# Altium PCB CONTROL.PcbDoc
Units mm, origin at the board's own origin, x right, y up, seen from the top; angles counter-clockwise.
Board outline 47.05 x 104.99 mm, 2 copper layers (Top Layer, Bottom Layer); 42 components, 19 nets, 156 pads, 0 vias.
Unrouted connection lines stored in the file: 2.
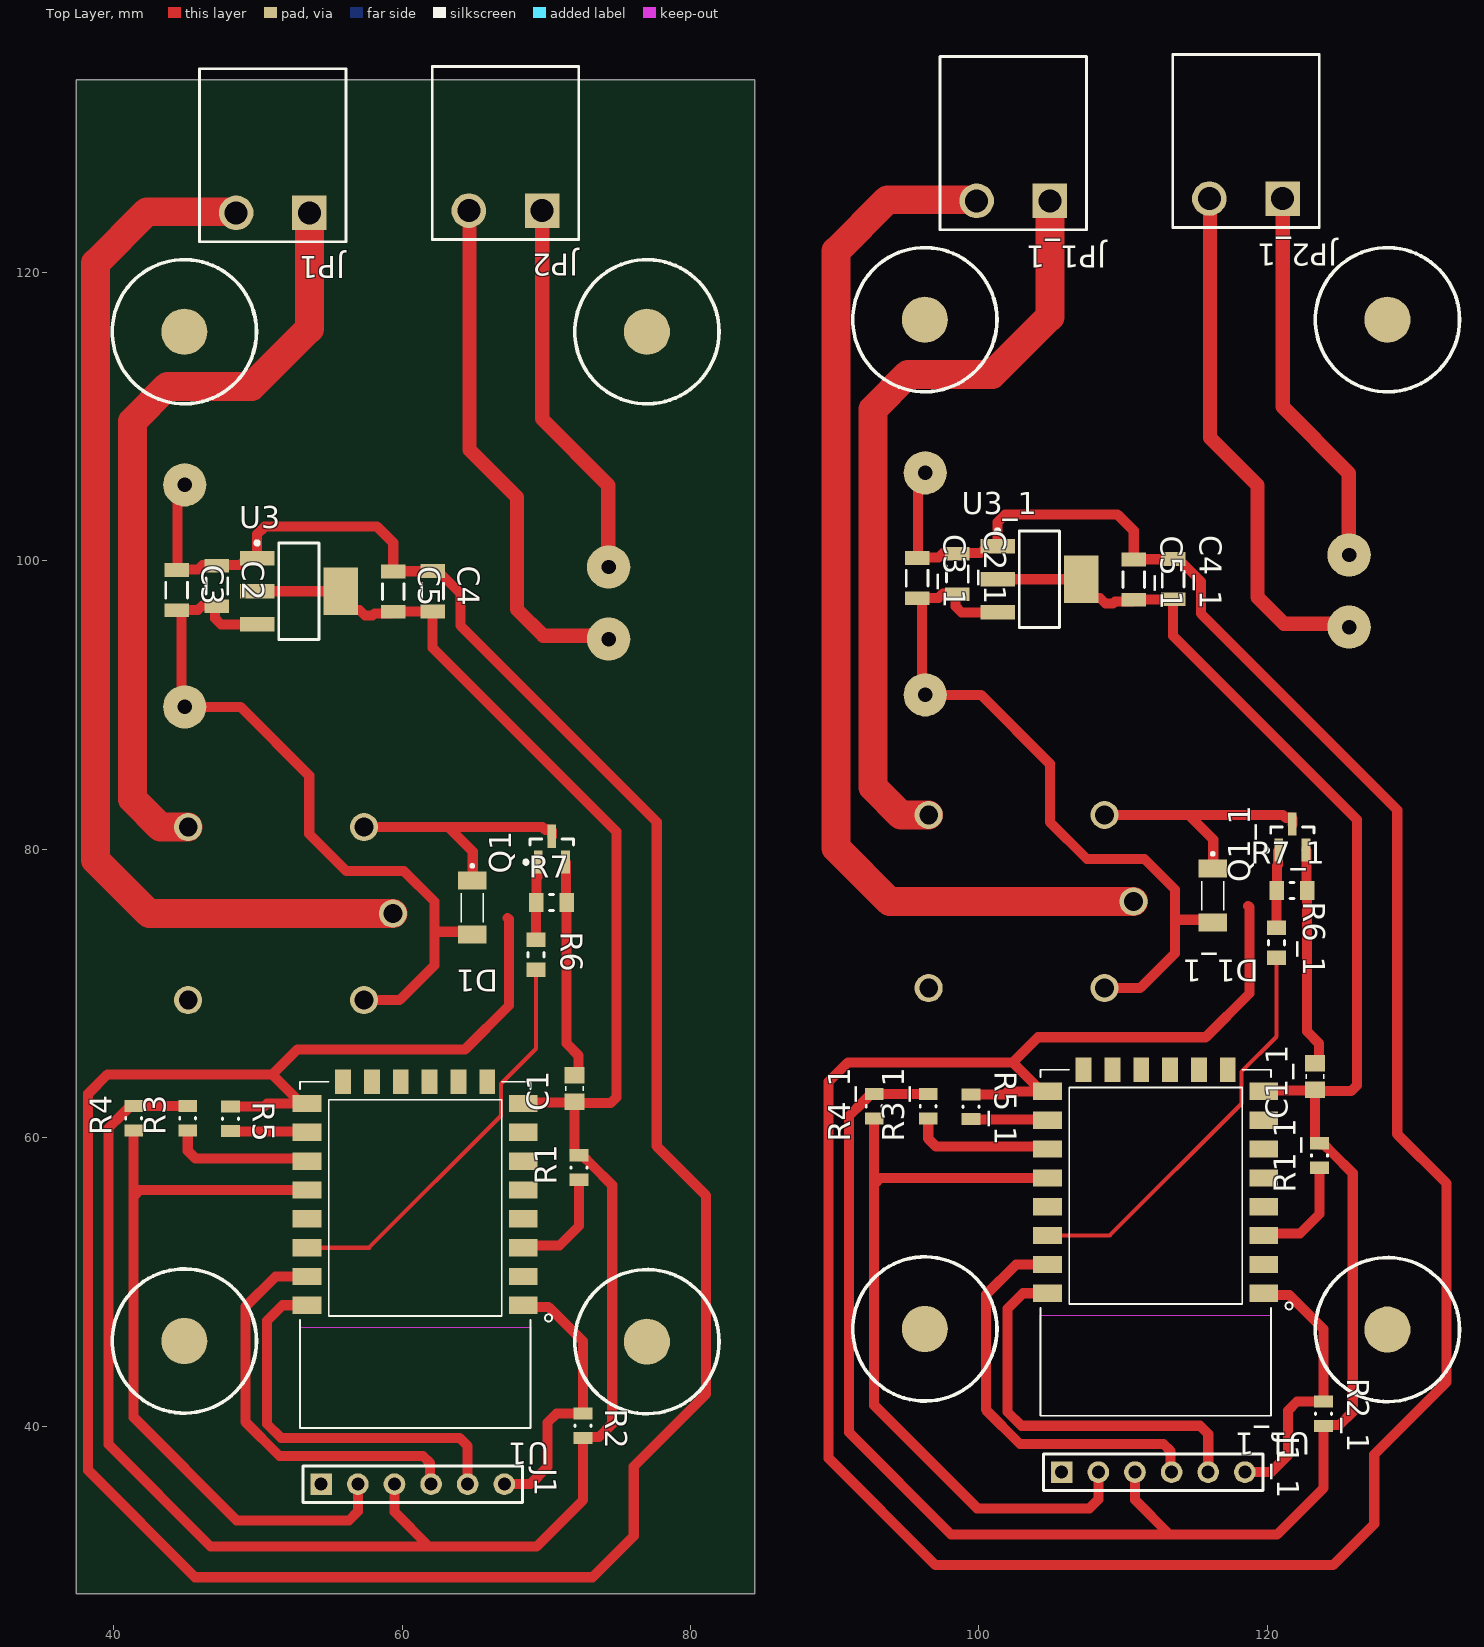
[diagram p0: Top Layer view]
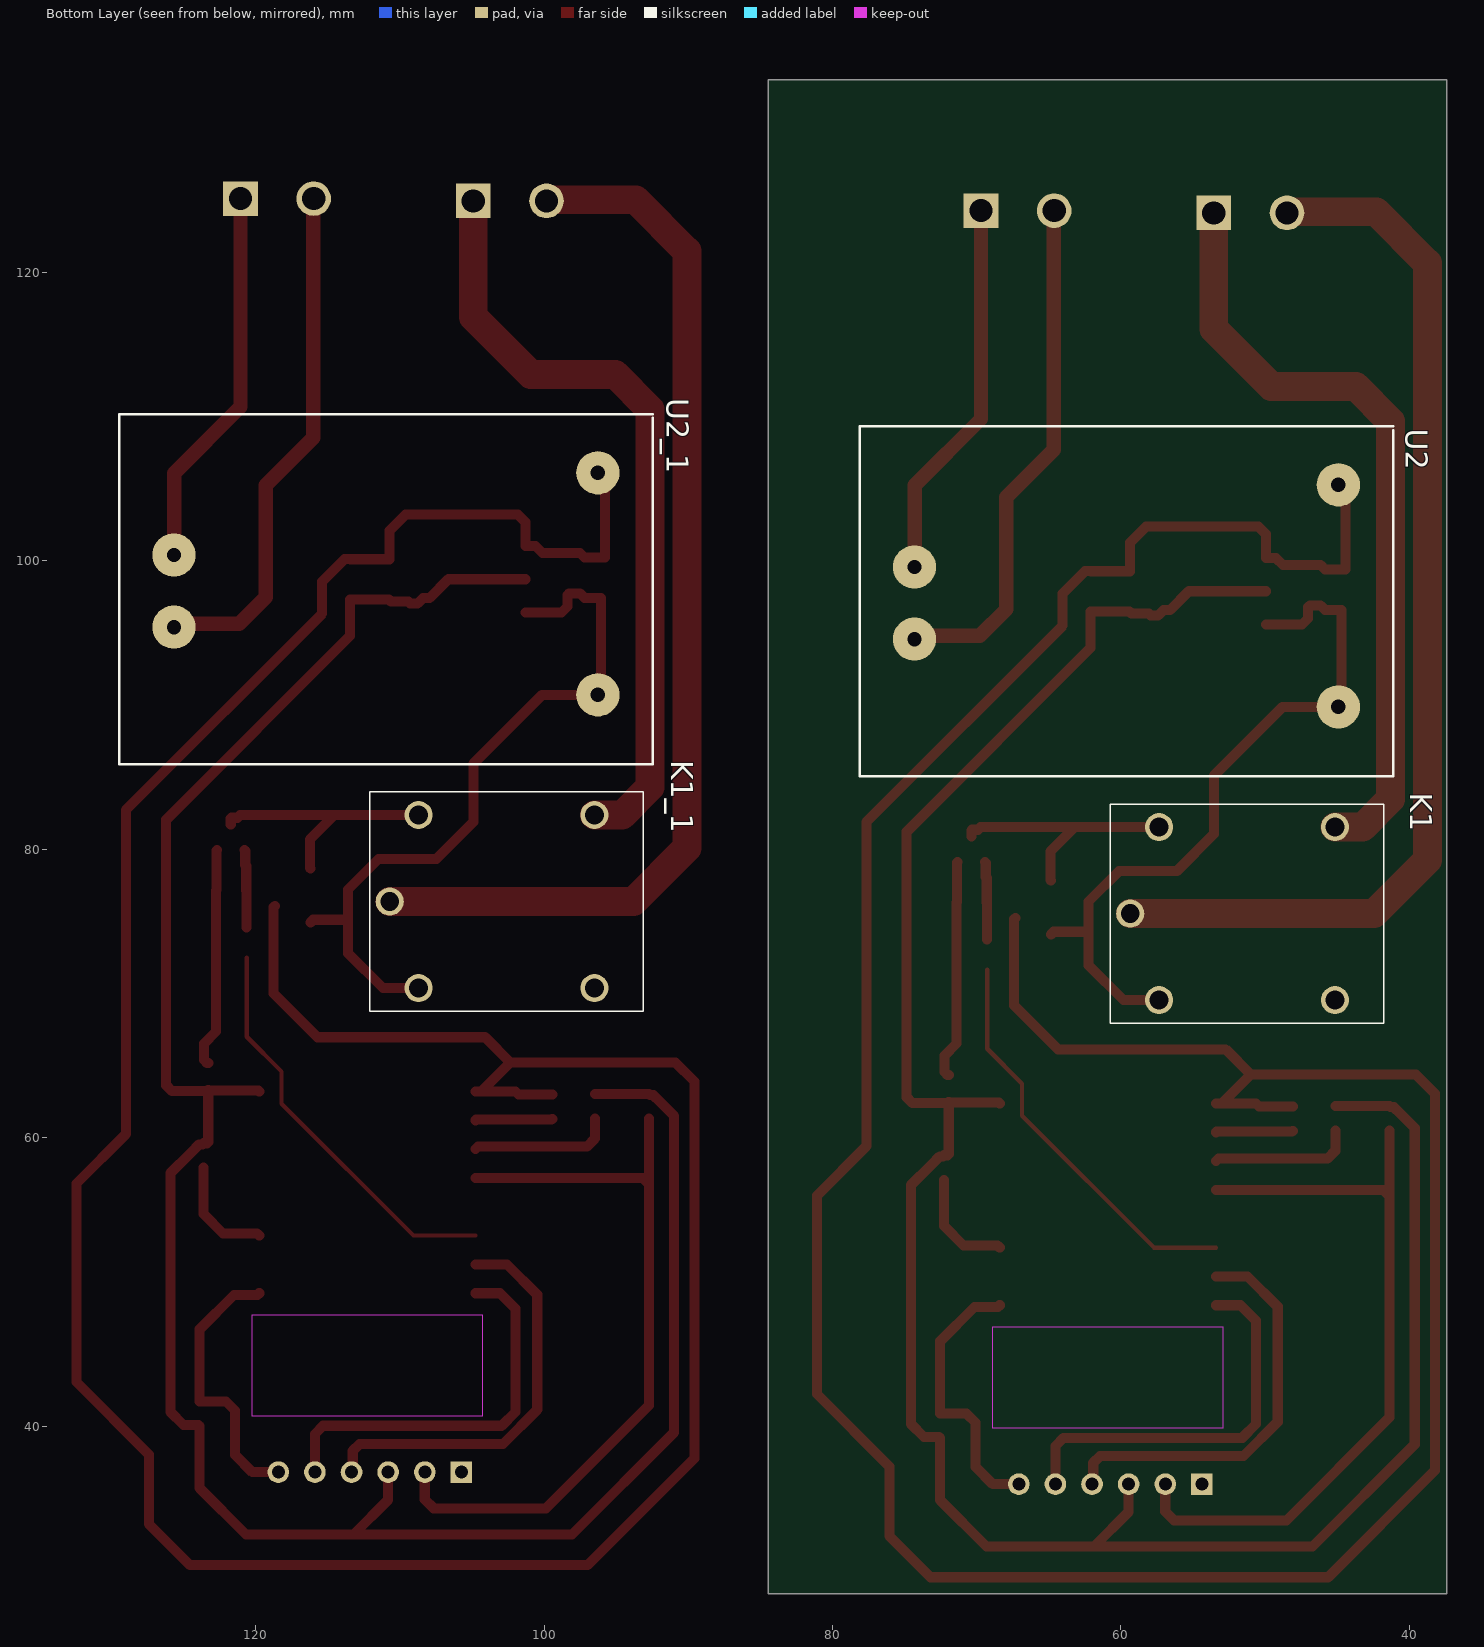
[diagram p1: Bottom Layer view, seen from below]

## Layer stack, top to bottom
Top Solder: solder mask 0.0102, Solder Resist, Dk 3.5
Top Layer: signal copper 0.0356
Dielectric 1: dielectric 0.32, FR-4, Dk 4.8
Bottom Layer: signal copper 0.0356
Bottom Solder: solder mask 0.0102, Solder Resist, Dk 3.5

## Board outline
37.401,28.378 37.401,133.368 84.455,133.368 84.455,28.378

## Design rules (kind name [scope] priority, off if disabled: settings)
Clearance [All] p1: gap=0.254 ignorepadtopadclearanceinfootprint=FALSE except(0: Arc-Hole Track-Hole SMDPad-Hole THPad-Hole Via-Hole Fill-Hole Poly-Hole Region-Hole Text-Hole)
PolygonConnect [All] p1: connectstyle=Relief reliefconductorwidth=0.254 reliefentries=4 polygonreliefangle="90 Angle" airgapwidth=0.254
RoutingVias [All] p1: holewidth=0.711 width=1.27 viastyle="Through Hole" minholewidth=0.711 minwidth=1.27 maxholewidth=0.711 maxwidth=1.27
SolderMaskExpansion [All] p1: expansion=0.102 istentingtop=FALSE
Width [All] p1: maxlimit=3 minlimit=0.254 preferedwidth=0.254
30 further rules are at their usual default settings.

## Classes and differential pairs
component class "Water Control": C1 C2 C3 C4 C5 D1 J1 JP1 JP2 K1 Q1 R1 R2 R3 R4 R5 R6 R7 U1 U2 U3

## Components (designator, comment, footprint, x,y, rotation, side; value= is the part's Value field where it differs from the comment)
C1 "08055C104KAJ2A" CAPC0805 71.939,63.409 r90 top
C1_1 "08055C104KAJ2A" CAPC0805 123.298,64.244 r90 top (schematic designator C1)
C2 "CAP 2.7uF 10V 1206(3216)" CAPC1206(3216)110_L 47.146,98.261 r270 top value=2.7uF
C2_1 "CAP 2.7uF 10V 1206(3216)" CAPC1206(3216)110_L 98.506,99.096 r270 top value=2.7uF (schematic designator C2)
C3 "CAP 2.7uF 10V 1206(3216)" CAPC1206(3216)110_L 44.348,97.969 r270 top value=2.7uF
C3_1 "CAP 2.7uF 10V 1206(3216)" CAPC1206(3216)110_L 95.707,98.804 r270 top value=2.7uF (schematic designator C3)
C4 "CAP 2.7uF 10V 1206(3216)" CAPC1206(3216)110_L 62.101,97.898 r270 top value=2.7uF
C4_1 "CAP 2.7uF 10V 1206(3216)" CAPC1206(3216)110_L 113.46,98.733 r270 top value=2.7uF (schematic designator C4)
C5 "CAP 2.7uF 10V 1206(3216)" CAPC1206(3216)110_L 59.373,97.866 r270 top value=2.7uF
C5_1 "CAP 2.7uF 10V 1206(3216)" CAPC1206(3216)110_L 110.732,98.701 r270 top value=2.7uF (schematic designator C5)
D1 "5.8V zener diode" BZT55B13GS08 64.857,75.951 r270 top
D1_1 "5.8V zener diode" BZT55B13GS08 116.216,76.786 r270 top (schematic designator D1)
J1 "22-23-2061" HDR1X6 54.38,35.967 r0 top
J1_1 "22-23-2061" HDR1X6 105.739,36.802 r0 top (schematic designator J1)
JP1 "LOAD" 691312510002 51.019,128.138 r180 top
JP1_1 "LOAD" 691312510002 102.378,128.973 r180 top (schematic designator JP1)
JP2 "LOAD" 691312510002 67.162,128.296 r180 top
JP2_1 "LOAD" 691312510002 118.521,129.131 r180 top (schematic designator JP2)
K1 "0476618" 0476618 51.251,75.541 r180 bottom
K1_1 "0476618" 0476618 102.611,76.376 r180 bottom (schematic designator K1)
Q1 "BC847" SOT23-3 70.373,80.005 r90 top
Q1_1 "BC847" SOT23-3 121.733,80.84 r90 top (schematic designator Q1)
R1 "2R55 1% 0805(2012)" RESC0805(2012)_L 72.258,57.927 r90 top value="2.55 Ohm"
R1_1 "2R55 1% 0805(2012)" RESC0805(2012)_L 123.617,58.762 r90 top value="2.55 Ohm" (schematic designator R1)
R2 "2R55 1% 0805(2012)" RESC0805(2012)_L 72.531,40.011 r270 top value="2.55 Ohm"
R2_1 "2R55 1% 0805(2012)" RESC0805(2012)_L 123.89,40.846 r270 top value="2.55 Ohm" (schematic designator R2)
R3 "2R55 1% 0805(2012)" RESC0805(2012)_L 45.121,61.338 r90 top value="2.55 Ohm"
R3_1 "2R55 1% 0805(2012)" RESC0805(2012)_L 96.48,62.173 r90 top value="2.55 Ohm" (schematic designator R3)
R4 "2R55 1% 0805(2012)" RESC0805(2012)_L 41.372,61.338 r90 top value="2.55 Ohm"
R4_1 "2R55 1% 0805(2012)" RESC0805(2012)_L 92.731,62.173 r90 top value="2.55 Ohm" (schematic designator R4)
R5 "2R55 1% 0805(2012)" RESC0805(2012)_L 48.081,61.31 r270 top value="2.55 Ohm"
R5_1 "2R55 1% 0805(2012)" RESC0805(2012)_L 99.44,62.145 r270 top value="2.55 Ohm" (schematic designator R5)
R6 "4.7K" RESC0805 69.273,72.685 r270 top
R6_1 "4.7K" RESC0805 120.633,73.52 r270 top (schematic designator R6)
R7 "100K" RESC0805 70.35,76.311 r0 top
R7_1 "100K" RESC0805 121.709,77.146 r0 top (schematic designator R7)
U1 "ESP8266-12E/ESP-12E" *XCVR_ESP8266-12E/ESP-12E 60.897,55.374 r180 top
U1_1 "ESP8266-12E/ESP-12E" *XCVR_ESP8266-12E/ESP-12E 112.256,56.209 r180 top (schematic designator U1)
U2 "230v to5v" 230V-5V 59.191,98.158 r180 bottom
U2_1 "230v to5v" 230V-5V 110.551,98.993 r180 bottom (schematic designator U2)
U3 "LM1117MPX-3.3" MP04A_N 52.833,97.894 r0 top
U3_1 "LM1117MPX-3.3" MP04A_N 104.192,98.729 r0 top (schematic designator U3)

## Footprints (in the part's own frame and the unit in brackets; to place one, negate y for a bottom-side part, rotate by r counter-clockwise, add the part's x,y. Pads: shape width x height; smd on the part's side, far side on the other; paste and mask are expansions set on the pad)
230V-5V [mm]
  round 3 hole 1: 1(-15.123,1.419) 2(-15.123,-3.581) 3(14.277,7.119) 4(14.277,-8.281)
  silkscreen extent -18.92,-13.08 18.08,11.18
0476618 [mm]
  round 1.95 hole 1.3: 1(-6.1,-6) 2(6.1,-6) 3(6.1,6) 4(-6.1,6) 5(-8.1,0)
  silkscreen extent -9.5,-7.6 9.5,7.6, body extent -9.5,-7.6 9.5,7.6, height 15
691312510002 [mm]
  rect 2.4x2.4 hole 1.6: 1(-2.54,4)
  round 2.4 hole 1.6: 2(2.54,4)
  silkscreen extent -5.08,-6 5.08,6, body extent -5.08,-6 5.08,6, height 8.55
*XCVR_ESP8266-12E/ESP-12E [mm]
  rect 2x1.2 smd: 1(-7.5,7) 2(-7.5,5) 3(-7.5,3) 4(-7.5,1) 5(-7.5,-1) 6(-7.5,-3) 7(-7.5,-5) 8(-7.5,-7) 15(7.5,-7) 16(7.5,-5) 17(7.5,-3) 18(7.5,-1) 19(7.5,1) 20(7.5,3) 21(7.5,5) 22(7.5,7)
  rect 1.1x1.7 smd: 9(-5,-8.5) 10(-3,-8.5) 11(-1,-8.5) 12(1,-8.5) 13(3,-8.5) 14(5,-8.5)
  Keep-Out Layer region: -8.009,15.5 8,15.5 8,8.51 -8.009,8.51
  Keep-Out Layer region: -8.009,15.5 8,15.5 8,8.51 -8.009,8.51
  Keep-Out Layer region: -8.009,15.5 8,15.5 8,8.51 -8.009,8.51
  Keep-Out Layer region: -8.009,15.5 8,15.5 8,8.51 -8.009,8.51
  Keep-Out Layer region: -8.009,15.5 8,15.5 8,8.51 -8.009,8.51
  Keep-Out Layer region: -8.009,15.5 8,15.5 8,8.51 -8.009,8.51
  silkscreen extent -9.5,-8.5 8,15.5
BZT55B13GS08 [mm]
  rect 1.25x2 smd: 1(-1.875,0) 2(1.875,0)
  silkscreen extent -3,-0.75 1,0.75
CAPC0805 [mm]
  rect 1.15x1.4 smd: 1(-0.925,0) 2(0.925,0)
  silkscreen extent -0.15,-0.6 0.15,0.6, body extent -1.1,-0.67 1.1,0.67, height 0.8
CAPC1206(3216)110_L [mm] "Chip Capacitor, Body 3.2x1.6mm, Height 1.1mm, IPC High Density"
  rect 0.95x1.7 smd: 1(-1.4,0) 2(1.4,0)
  silkscreen extent -0.55,-0.75 0.55,0.75, body extent -1.7,-0.9 1.7,0.9, height 1.1
HDR1X6 [mm] "Connector; Header; 6 Position"
  rect 1.5x1.5 hole 0.9: 1(0,0)
  round 1.5 hole 0.9: 2(2.54,0) 3(5.08,0) 4(7.62,0) 5(10.16,0) 6(12.7,0)
  silkscreen extent -1.27,-1.27 13.97,1.27
MP04A_N [mm] "SOT223, 4-Leads, Body 6.5x3.5mm, Pitch 2.3mm, Lead Span 7mm, IPC Medium Density"
  rect 2.4x1 smd: 1(-2.9,2.3) 2(-2.9,0) 3(-2.9,-2.3)
  rect 2.4x3.3 smd: 4(2.9,0)
  silkscreen extent -3.02,-3.35 1.4,3.47, body extent -1.86,-3.35 1.86,3.35, height 1.8
RESC0805 [mm]
  rect 1x1.3 smd: 1(-1.05,0) 2(1.05,0)
  silkscreen extent -0.15,-0.55 0.15,0.55, body extent -1.1,-0.62 1.1,0.63, height 0.6
RESC0805(2012)_L [mm] "Chip Resistor, Body 2.0x1.3mm, IPC High Density"
  rect 0.85x1.3 smd: 1(-0.85,0) 2(0.85,0)
  silkscreen extent -0.05,-0.55 0.05,0.55, body extent -1.1,-0.67 1.1,0.68, height 0.7
SOT23-3 [mm]
  rect 1.6x0.6 smd: 1(-0.9,0.95) 2(-0.9,-0.95) 3(0.9,0)
  silkscreen extent -1.02,-1.5 0.7,1.92, body extent -0.7,-1.5 0.7,1.5, height 1.1

## Part data
C1 C1_1: library part CMP-2007-04765-1, Manufacturer="AVX Interconnect / Elco", Part Number=08055C104KAJ2A
C2 C2_1 C3 C3_1 C4 C4_1 C5 C5_1: library part CMP-1037-04841-1, "CAP 2.7uF 10V ±10% 1206 (3216 Metric) Thickness 1.05mm SMD", Case-EIA=1206, Case-Metric=3216, Rated Voltage="10 V", Tolerance=Â±10%, Max Thickness="1.05 mm", Technology=SMT
D1 D1_1: library part DIODE
J1 J1_1: library part CMP-2000-05536-1, "Male Header, Pitch 2.54 mm, 1 x 6 Position, Height 10.67 mm, Tail Length 3.56 mm, 0 to 70 degC, RoHS, Bulk", Current Rating=4A, Manufacturer=Molex, Package Description="Male Header, Pitch 2.54 mm, 1 x 6 Position, Height 10.67 mm, Tail Length 3.56 mm", Voltage Rating=250V, =002223206122-23-2061-PBA-6373-06A102, Brand=Molex, Contact Material=Brass, Contact Plating=Tin, Datasheet URL=https://datasheet.ciiva.com/19460/232303-19460895.pdf, Datasheet Version="Rev. P, 09/2001", Factory Pack Quantity=1000, Housing Material=Nylon, Manufacturer URL=http://www.molex.com/, Mounting Angle=Vertical, Mounting Style=ThroughHole, Mounting Technology=ThroughHole, Number of Positions=6, Number of Positions / Contacts=6, Number of Rows=1, Package Reference=22-23-2061, Packaging=Bulk, Pitch=2.54mm, Product Category=.100K.K.Connectors, Product Type=Headers, RoHS=Details, Series=6373, Termination Style=ThroughHole, Tradename=KK, Type=PinStrip
JP1 JP1_1 JP2 JP2_1: library part "HEADER 2"
K1 K1_1: "Relay or Contactor", Manufacturer_Name="RS Components", Datasheet Link=https://docs-emea.rs-online.com/webdocs/1583/0900766b81583163.pdf, Height=15mm, Manufacturer_Part_Number=0476618
Q1 Q1_1: library part "NPN BEC"
R1 R1_1 R2 R2_1 R3 R3_1 R4 R4_1 R5 R5_1: library part CMP-1013-00215-1, "2R55 0.125W 1% 0805 (2012 Metric)  SMD", Case-EIA=0805, Case-Metric=2012, Power="0.125 W", Tolerance="1 %", Technology=SMT
R6 R6_1 R7 R7_1: library part RES1, "RESISTOR"
U1 U1_1: "This WiFi module has a 32-bit MCU micro and clock speeds supporting 80 MHz or 160 MHz. Supports the RTOS and integrated Wi-Fi MAC/BB/RF/PA/LNA, and has an on-board antenna.", Package=None, Availability=Unavailable, MF=AI-Thinker, MP=ESP8266-12E/ESP-12E, Price=None, SnapEDA_Link=https://www.snapeda.com/parts/ESP8266-12E/ESP-12E/AI-Thinker/view-part/?ref=snap
U3 U3_1: library part CMP-0062-01659-3, "800mA Low-Dropout Linear Regulator, 4-pin SOT-223", Manufacturer="National Semiconductor", PackageTopMarking=XYTT*N05A, PowerWise=N, Code_IPC=SOT223-4, Code_JEDEC=TO-261-AA, ComponentLink1Description="Manufacturer URL", ComponentLink1URL=http://www.national.com/, ComponentLink2Description="LM1117 Datasheet", ComponentLink2URL=http://www.national.com/ds/LM/LM1117.pdf, ComponentLink3Description="LM1117 Web Page", ComponentLink3URL=http://www.national.com/pf/LM/LM1117.html, ComponentLink4Description="MP04A Package Page", ComponentLink4URL=http://www.national.com/packaging/folders/mp04a.html, CompType="LDO IC", DatasheetVersion=Apr-2006, High-Reliability=Y, PackageDescription="Molded SOT-223, 6.50 x 3.56 x 1.6mm Body, 4 Lead, 2.3mm Pitch", PackageReference=MP04A, PackageVersion="revB, Apr-2003", PartNumber=LM1117MPX-3.3, PinCount=4, RevisionNote="SCH symbol layout adjusted", RoHS=N

## Free pads (board coordinates)
  round 3.2 smd: ""(44.887,45.896) ""(44.887,115.896) ""(76.969,45.852) ""(76.969,115.895) ""(96.246,46.731) ""(96.246,116.731) ""(128.328,46.687) ""(128.329,116.73)

## Nets (pads, with @x,y where several pads share a name; then routed paths per layer and width w, separated by ;. In a path a pad name is that pad's centre, name@x,y a point inside that pad or via, vN(x,y) a via of type N, cw(c..) or ccw(c..) an arc to the next point about the centre after c; other vN are vias at no path point)
+3.3V: C1.1 C4.2 C5.2 J1.3 R1.2 R2.2 R3.2 R4.2 U1.8 U3.2 U3.4 | length 159.7
  Top Layer w0.7: R3.2 R4.2 41.297,62.113 41.072,62.113 40.577,61.618 40.573,61.618 39.62,60.665 39.62,38.734 46.707,31.646 61.86,31.646 ; U3.2 55.283,97.894 56.583,96.594 57.033,96.594 57.41,96.217 57.944,96.217 58.069,96.341 59.248,96.341 C5.2 59.389,96.482 62.085,96.482 C4.2 62.101,93.977 74.858,81.22 74.858,62.801 74.448,62.391 72.032,62.391 C1.1 ; J1.3 59.46,34.047 61.86,31.646 ; U1.8 68.452,62.429 71.884,62.429 C1.1 ; 61.86,31.646 69.32,31.646 72.531,34.857 R2.2 72.606,39.236 73.651,39.236 74.565,40.15 74.565,56.699 73.158,58.106 73.154,58.106 72.558,58.702 72.333,58.702 R1.2 72.033,58.777 71.939,58.871 C1.1
+5V: C2.2 C3.2 D1.2 K1.1 U2.4 U3.3 | length 51.5
  Top Layer w0.7: U3.3 47.431,95.594 47.021,96.004 47.021,96.789 46.896,96.914 46.146,96.914 45.838,96.606 44.702,96.606 44.702,90.09 U2.4 48.779,89.877 53.553,85.103 53.553,81.059 56.126,78.486 60.125,78.486 62.239,76.372 62.239,74.281 ; K1.1 59.823,69.541 62.239,71.957 62.239,74.281 ; D1.2 64.652,74.281 62.239,74.281
COM_2: JP1.2 K1.5 | length 74.8
  Top Layer w2: JP1.2 48.402,124.215 42.292,124.215 38.735,120.658 38.735,79.256 42.45,75.541 K1.5
DTR: J1.2 R4.1 U1.18 | length 52.8
  Top Layer w0.7: R4.1 41.372,55.939 ; U1.18 41.807,56.374 41.372,55.939 ; J1.2 56.92,34.067 56.305,33.453 48.519,33.453 41.372,40.6 41.372,55.939
GND: C1.2 C2.1 C3.1 C4.1 C5.1 J1.1 Q1.2 R5.1 R7.2 U1.15 U2.3 U3.1 | length 235.1
  Top Layer w0.7: U2.3 44.914,104.655 44.426,104.166 44.426,99.406 45.838,99.406 46.146,99.714 48.753,99.714 49.233,100.194 U3.1 49.933,101.853 50.455,102.375 58.258,102.375 59.373,101.26 C5.1 59.389,99.282 62.085,99.282 C4.1 62.476,99.298 64.034,97.74 64.034,95.509 77.651,81.892 77.651,59.409 81.081,55.98 81.081,42.218 76.056,37.193 76.056,32.37 73.201,29.514 45.626,29.514 38.215,36.926 38.215,63.054 39.544,64.383 50.987,64.383 ; R5.1 50.42,62.16 50.633,62.374 U1.15@52.997,62.374 ; U1.15 U1.15@52.997,62.374 ; 67.311,75.241 67.401,75.151 67.401,69.165 64.363,66.128 52.732,66.128 50.987,64.383 ; Q1.2 71.362,79.067 71.362,76.349 R7.2 71.4,66.523 72.235,65.688 72.235,64.559 72.01,64.334 C1.2 ; 50.987,64.383 U1.15@52.997,62.374
NC_2: K1.2
NetD1_1: D1.1 K1.4 Q1.3 | length 17.9
  Top Layer w0.7: K1.4 63.193,81.541 ; D1.1 64.888,77.857 64.888,79.846 63.193,81.541 ; Q1.3 70.374,81.305 70.324,81.355 69.924,81.355 69.738,81.541 63.193,81.541
NetQ1_1: Q1.1 R6.1 R7.1 | length 5.4
  Top Layer w0.7: R6.1 69.287,73.748 69.287,76.298 R7.1 69.3,78.011 69.373,78.084 69.373,79.055 Q1.1
NetR1_1: R1.1 U1.3 | length 7.7
  Top Layer w0.7: U1.3 68.548,52.524 70.913,52.524 72.258,53.869 R1.1
NetR3_1: R3.1 U1.17 | length 10
  Top Layer w0.7: R3.1 45.121,59.094 45.671,58.544 53.227,58.544 U1.17
NEUTRAL: JP2.2 U2.2 | length 36.2
  Top Layer w1: JP2.2@64.666,124.296 64.666,107.712 67.96,104.418 67.96,96.637 69.794,94.802 74.089,94.802 U2.2
NO_2: JP1.1 K1.3 | length 53.8
  Top Layer w2: K1.3 43.232,81.541 41.301,83.472 41.301,109.688 43.714,112.101 49.567,112.101 53.559,116.092 JP1.1
PHASE: JP2.1 U2.1 | length 26.6
  Top Layer w1: JP2.1@69.199,124.032 69.7,123.531 69.7,109.848 74.296,105.252 74.296,99.595 U2.1
RELAY2: R6.2 U1.20 | length 28.4
  Top Layer w0.3: U1.20 57.702,52.374 66.851,61.523 66.851,63.744 69.273,66.167 R6.2
RST: J1.6 R2.1 U1.1 | length 19.5
  Top Layer w0.7: J1.6 68.88,35.967 70.082,37.169 70.082,40.238 70.704,40.861 R2.1 72.531,45.88 70.158,48.253 68.517,48.253 U1.1
RX: J1.4 U1.21 | length 28.6
  Top Layer w0.7: U1.21 51.221,50.374 49.119,48.272 49.119,40.297 51.492,37.924 61.435,37.924 61.914,37.445 61.914,36.052 J1.4
RX1: U1.7
TX: J1.5 U1.22 | length 27.6
  Top Layer w0.7: U1.22 51.698,48.374 50.624,47.3 50.624,40.141 51.584,39.181 63.972,39.181 64.54,38.614 J1.5
TX1: R5.2 U1.16 | length 5.4
  Top Layer w0.7: R5.2 48.124,60.417 53.354,60.417 U1.16
pads on no net: C1_1.1 C1_1.2 C2_1.1 C2_1.2 C3_1.1 C3_1.2 C4_1.1 C4_1.2 C5_1.1 C5_1.2 D1_1.1 D1_1.2 J1_1.1 J1_1.2 J1_1.3 J1_1.4 J1_1.5 J1_1.6 JP1_1.1 JP1_1.2 JP2_1.1 JP2_1.2 K1_1.1 K1_1.2 K1_1.3 K1_1.4 K1_1.5 Q1_1.1 Q1_1.2 Q1_1.3 R1_1.1 R1_1.2 R2_1.1 R2_1.2 R3_1.1 R3_1.2 R4_1.1 R4_1.2 R5_1.1 R5_1.2 R6_1.1 R6_1.2 R7_1.1 R7_1.2 U1.2 U1.4 U1.5 U1.6 U1.9 U1.10 U1.11 U1.12 U1.13 U1.14 U1.19 U1_1.1 U1_1.2 U1_1.3 U1_1.4 U1_1.5 U1_1.6 U1_1.7 U1_1.8 U1_1.9 U1_1.10 U1_1.11 U1_1.12 U1_1.13 U1_1.14 U1_1.15 U1_1.16 U1_1.17 U1_1.18 U1_1.19 U1_1.20 U1_1.21 U1_1.22 U2_1.1 U2_1.2 U2_1.3 U2_1.4 U3_1.1 U3_1.2 U3_1.3 U3_1.4
copper on no net: | length 840.8
  Top Layer w0.3: 104.756,53.209 109.061,53.209 118.21,62.358 118.21,64.579 120.633,67.002 120.633,72.47
  Top Layer w0.7: 92.731,61.323 92.731,56.774 ; 96.274,106.112 96.274,105.49 95.785,105.001 95.785,100.241 97.197,100.241 97.505,100.549 100.112,100.549 100.592,101.029 101.292,101.029 101.292,102.689 101.814,103.211 109.617,103.211 110.732,102.095 110.732,100.101 110.748,100.117 113.444,100.117 113.46,100.133 113.835,100.133 115.394,98.575 115.394,96.344 129.011,82.727 129.011,60.244 132.44,56.815 132.44,43.053 127.416,38.028 127.416,33.205 124.56,30.349 96.986,30.349 89.574,37.761 89.574,63.889 90.903,65.219 102.347,65.219 ; 96.48,61.323 96.48,59.929 97.03,59.379 104.586,59.379 104.756,59.209 ; 96.48,63.023 92.731,63.023 92.656,62.948 92.431,62.948 91.936,62.453 91.932,62.453 90.979,61.5 90.979,39.569 98.067,32.482 113.22,32.482 ; 99.44,61.295 99.483,61.252 104.713,61.252 104.756,61.209 ; 99.44,62.995 101.779,62.995 101.993,63.209 104.356,63.209 ; 101.292,96.429 98.79,96.429 98.38,96.839 98.38,97.624 98.255,97.749 97.505,97.749 97.197,97.441 96.061,97.441 96.061,90.925 96.274,90.712 100.139,90.712 104.912,85.938 104.912,81.894 107.486,79.321 111.484,79.321 113.598,77.207 113.598,75.116 ; 101.292,98.729 106.642,98.729 107.942,97.429 108.392,97.429 108.77,97.052 109.304,97.052 109.428,97.176 110.607,97.176 110.732,97.301 110.748,97.317 113.444,97.317 113.46,97.333 113.46,94.812 126.217,82.055 126.217,63.636 125.807,63.226 123.391,63.226 123.298,63.319 ; 104.756,49.209 103.057,49.209 101.984,48.135 101.984,40.976 102.943,40.016 115.331,40.016 115.899,39.449 115.899,36.802 ; 104.756,51.209 102.58,51.209 100.479,49.107 100.479,41.132 102.851,38.76 112.794,38.76 113.274,38.28 113.274,36.887 113.359,36.802 ; 104.756,57.209 93.166,57.209 92.731,56.774 ; 104.756,63.209 104.356,63.209 ; 108.279,36.802 108.279,34.903 107.665,34.288 99.878,34.288 92.731,41.435 92.731,56.774 ; 108.711,70.376 111.182,70.376 113.598,72.792 113.598,75.116 ; 108.711,82.376 114.552,82.376 ; 110.819,36.802 110.819,34.882 113.22,32.482 ; 116.216,74.911 116.012,75.116 113.598,75.116 ; 116.216,78.661 116.247,78.693 116.247,80.681 114.552,82.376 ; 118.439,36.802 120.239,36.802 121.441,38.005 121.441,41.074 122.063,41.696 123.89,41.696 123.89,46.715 121.517,49.088 119.877,49.088 119.756,49.209 ; 118.67,76.076 118.76,75.987 118.76,70 115.722,66.963 104.091,66.963 102.347,65.219 ; 119.756,53.209 119.907,53.36 122.273,53.36 123.617,54.704 123.617,57.912 ; 119.756,63.209 119.812,63.264 123.243,63.264 123.298,63.319 ; 120.633,74.57 120.646,74.583 120.646,77.133 120.659,77.146 120.659,78.846 120.733,78.919 120.733,79.89 120.783,79.94 ; 121.733,81.74 121.733,82.14 121.683,82.19 121.283,82.19 121.097,82.376 114.552,82.376 ; 122.683,79.94 122.721,79.902 122.721,77.184 122.759,77.146 122.759,67.358 123.595,66.523 123.595,65.394 123.37,65.169 123.298,65.169 ; 102.347,65.219 104.356,63.209 ; 113.22,32.482 120.679,32.482 123.89,35.693 123.89,39.996 123.965,40.071 125.01,40.071 125.924,40.985 125.924,57.534 124.518,58.941 124.513,58.941 123.917,59.537 123.692,59.537 123.617,59.612 123.392,59.612 123.298,59.706 123.298,63.319
  Top Layer w1: 116.025,125.131 116.025,108.547 119.319,105.253 119.319,97.472 121.153,95.638 125.448,95.638 125.674,95.412 ; 120.558,124.868 121.06,124.366 121.06,110.683 125.655,106.087 125.655,100.431 125.674,100.412
  Top Layer w2: 96.511,82.376 94.592,82.376 92.661,84.307 92.661,110.523 95.074,112.936 100.926,112.936 104.918,116.927 104.918,124.973 ; 99.838,124.973 99.761,125.05 93.651,125.05 90.095,121.494 90.095,80.091 93.809,76.376 110.711,76.376

## Silkscreen, mask and mechanical layers (free items; w line width, h text height)
Top Overlay:
  circle w0.254: c96.246,116.731 r5
  circle w0.254: c96.246,46.731 r5
  circle w0.254: c128.329,116.73 r5
  circle w0.254: c128.329,46.687 r5
  circle w0.254: c76.969,45.852 r5
  circle w0.254: c76.969,115.895 r5
  circle w0.254: c44.887,45.896 r5
  circle w0.254: c44.887,115.896 r5
Mechanical 1:
  lines w0.2: 37.396,28.4 37.396,133.39 ; 37.401,28.378 84.455,28.378 ; 37.401,133.368 84.455,133.368 ; 84.464,28.385 84.464,133.375 ; 88.755,29.235 88.755,134.225 ; 88.76,29.213 135.814,29.213 ; 88.76,134.203 135.814,134.203 ; 135.823,29.221 135.823,134.21